# EAGLE board TestPlatform (EAGLE 9.6.2)
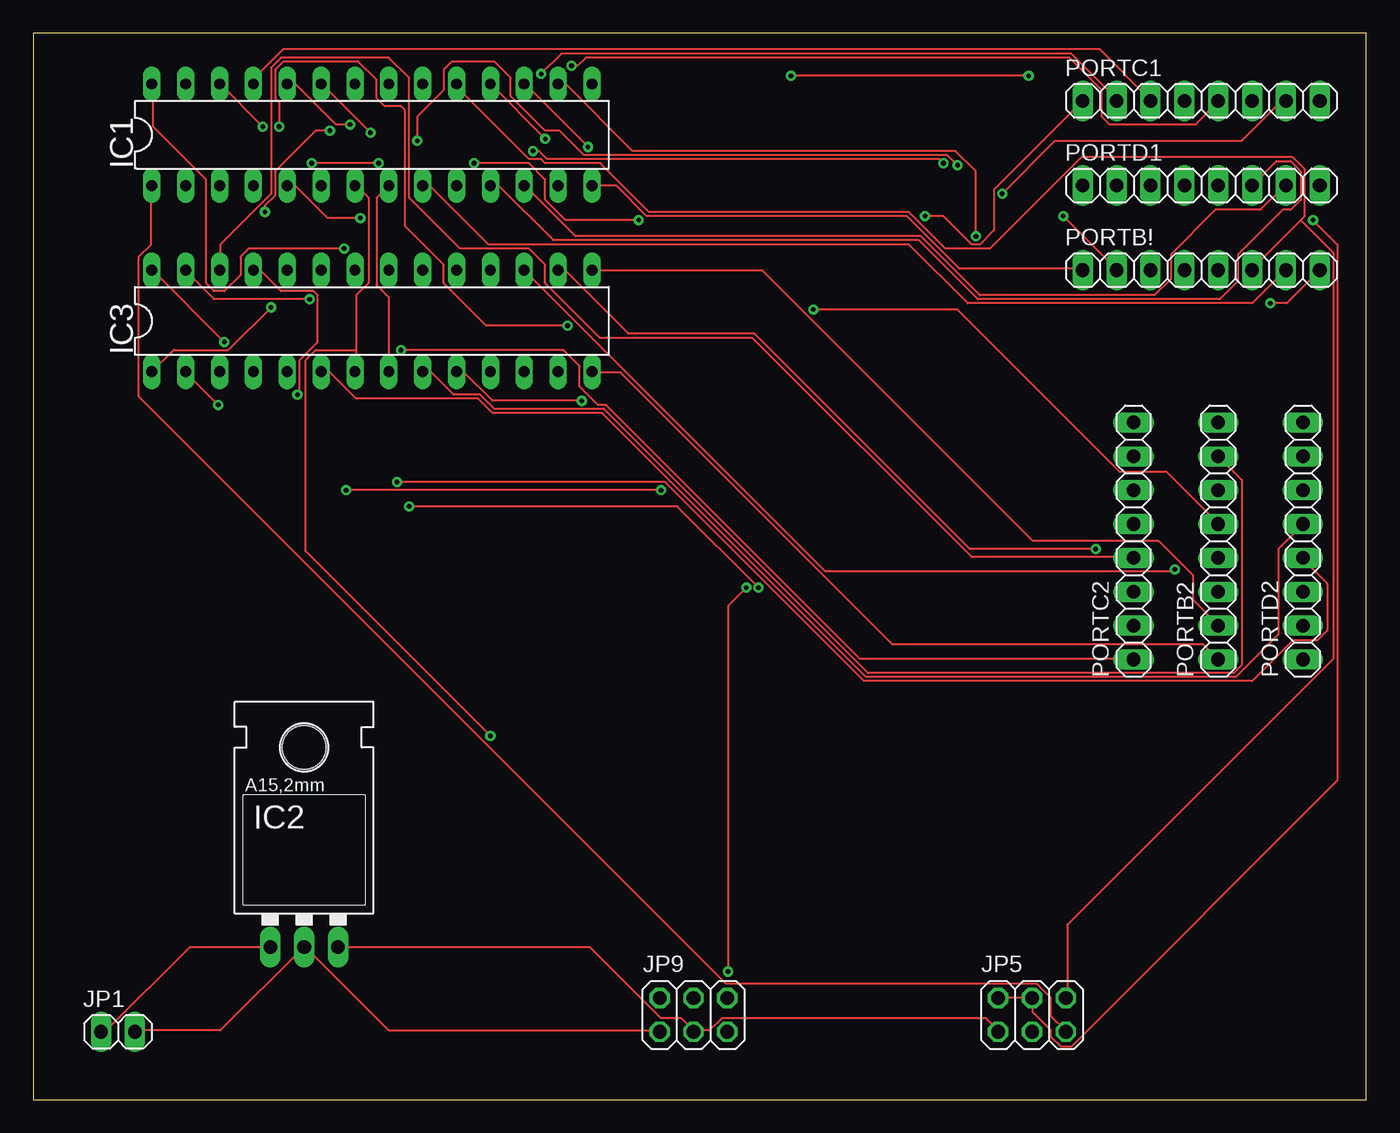
[diagram p0: board, top side]
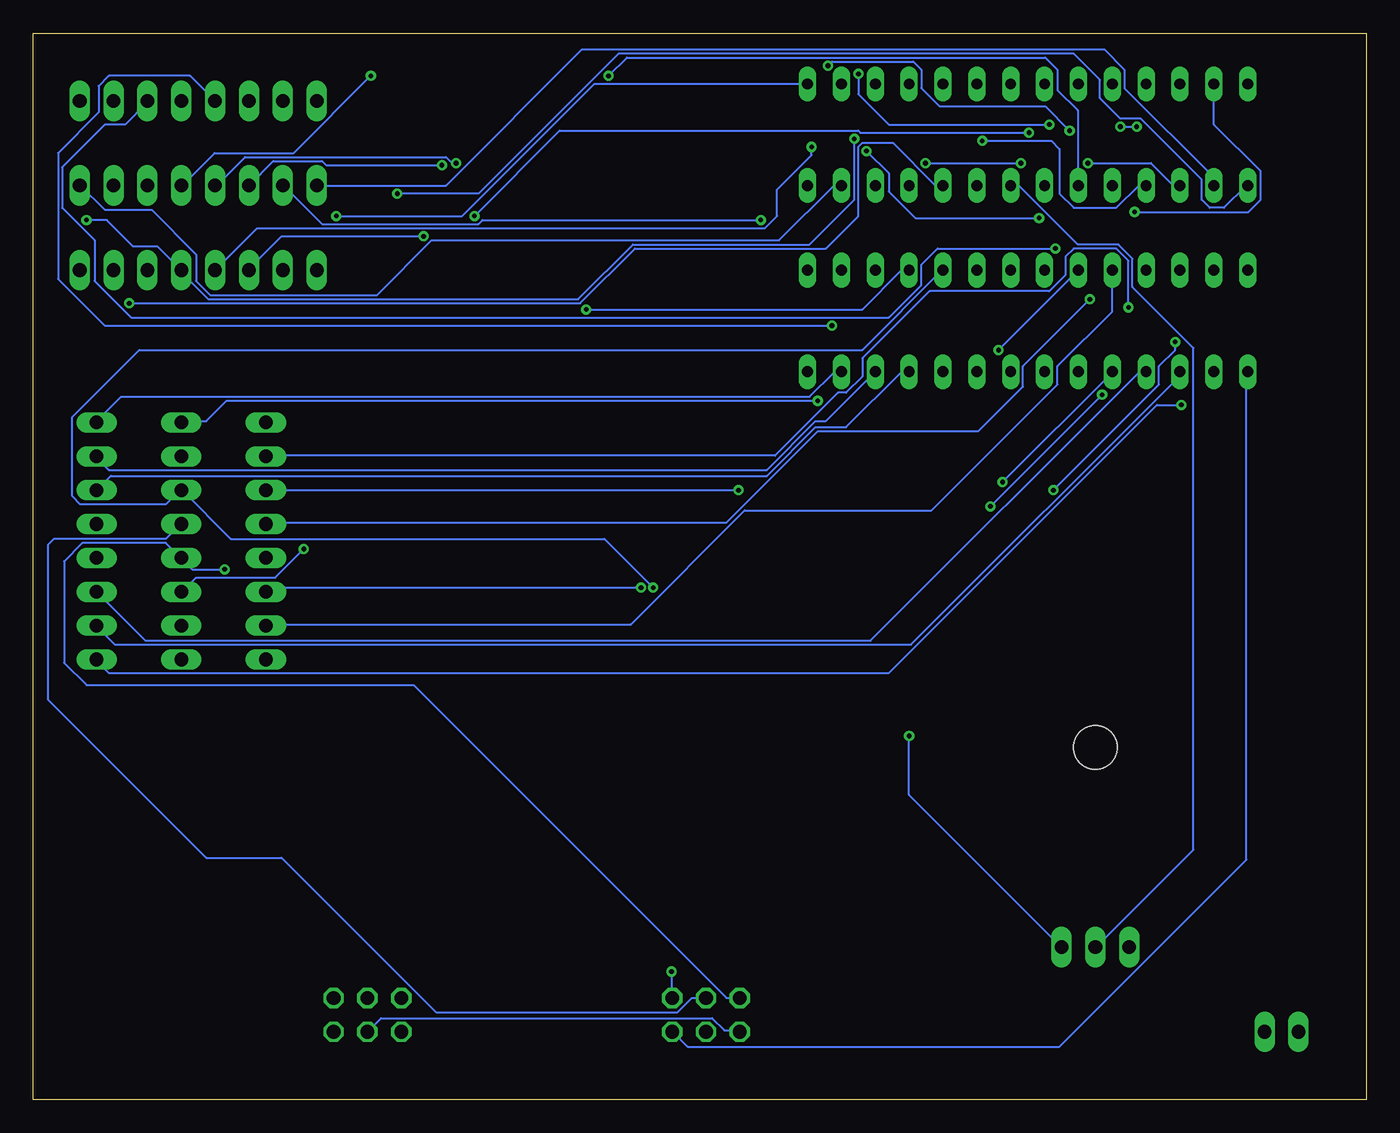
[diagram p1: board, bottom side, seen from below]

Size 100 x 80 mm. Coordinates in mm from the lower left corner, seen from the top.
Outline: 0,0 100,0 100,80 0,80 0,0
Copper layers (1*16): Top 0.035mm / dielectric 1.5mm / Bottom 0.035mm
Design rules "default": minimum track width 6mil, minimum drill 0.35mm, track to track 6mil, track to pad 6mil, pad to pad 6mil, via to via 6mil, smd to smd 6mil, copper to edge 40mil, drill to drill 6mil, minimum pad ring 10mil, minimum via ring 8mil, stop-mask expansion 4mil, vias tented up to drill 0mil, thermal gap 10mil

## Footprints (pad centres in the part's own frame; a part is rotated, then mirrored left to right if it is on the bottom)
DIL28-3 = drill 0.813 long: 1 -16.51,-3.81; 2 -13.97,-3.81; 3 -11.43,-3.81; 4 -8.89,-3.81; 5 -6.35,-3.81; 6 -3.81,-3.81; 7 -1.27,-3.81; 8 1.27,-3.81; 9 3.81,-3.81; 10 6.35,-3.81; 11 8.89,-3.81; 12 11.43,-3.81; 13 13.97,-3.81; 14 16.51,-3.81; 15 16.51,3.81; 16 13.97,3.81; 17 11.43,3.81; 18 8.89,3.81; 19 6.35,3.81; 20 3.81,3.81; 21 1.27,3.81; 22 -1.27,3.81; 23 -3.81,3.81; 24 -6.35,3.81; 25 -8.89,3.81; 26 -11.43,3.81; 27 -13.97,3.81; 28 -16.51,3.81
78XXL = drill 1.016 long: GND 0,-3.81; IN -2.54,-3.81; OUT 2.54,-3.81 | hole 3.302: 0,11.176
1X02 = drill 1.016 long: 1 -1.27,0; 2 1.27,0
2X03 = drill 1.016 octagon: 1 -2.54,-1.27; 2 -2.54,1.27; 3 0,-1.27; 4 0,1.27; 5 2.54,-1.27; 6 2.54,1.27
1X08 = drill 1.016 long: 1 -8.89,0; 2 -6.35,0; 3 -3.81,0; 4 -1.27,0; 5 1.27,0; 6 3.81,0; 7 6.35,0; 8 8.89,0

## Placement (x,y rotation side)
IC1  ATMEGA168-20P  [DIL28-3]  25.4,72.39 0 top
IC2  [78XXL]  20.32,15.24 0 top
IC3  ATMEGA168-20P  [DIL28-3]  25.4,58.42 0 top
JP1  [1X02]  6.35,5.08 0 top
JP5  [2X03]  74.93,6.35 0 top
JP9  [2X03]  49.53,6.35 0 top
PORTB2  [1X08]  88.9,41.91 90 top
PORTB!  [1X08]  87.63,62.23 0 top
PORTC1  [1X08]  87.63,74.93 0 top
PORTC2  [1X08]  82.55,41.91 90 top
PORTD1  [1X08]  87.63,68.58 0 top
PORTD2  [1X08]  95.25,41.91 90 top

## Library data of the parts
IC1 IC3 = adafruit
IC2 = v-reg
JP1 JP5 JP9 PORTB2 PORTB! PORTC1 PORTC2 PORTD1 PORTD2 = pinhead

## Nets
N$1: IC1.8 IC2.GND IC3.8 JP1.2 JP5.3 JP9.1
N$2: IC2.IN JP1.1
N$4: IC1.2 PORTD1.1
N$5: IC1.3 PORTD1.2
N$6: IC1.4 PORTD1.3
N$7: IC1.5 PORTD1.4
N$8: IC1.6 PORTD1.5
N$9: IC1.11 PORTD1.6
N$10: IC1.12 PORTD1.7
N$11: IC1.13 PORTD1.8
N$12: IC1.14 PORTB!.1
N$13: IC1.15 PORTB!.2
N$14: IC1.16 PORTB!.3
N$15: IC1.17 PORTB!.4
N$16: IC1.18 JP5.2 JP5.4 PORTB!.5
N$17: IC1.19 JP5.6 PORTB!.6
N$18: IC1.9 PORTB!.7
N$19: IC1.10 PORTB!.8
N$20: IC1.23 PORTC1.1
N$21: IC1.24 PORTC1.2
N$22: IC1.25 PORTC1.3
N$23: IC1.26 PORTC1.4
N$24: IC1.27 PORTC1.5
N$25: IC1.28 PORTC1.6
N$26: IC1.1 JP5.5 PORTC1.7
N$27: IC3.2 PORTD2.1
N$28: IC3.3 PORTD2.2
N$29: IC3.4 PORTD2.3
N$30: IC3.5 PORTD2.4
N$31: IC3.6 PORTD2.5
N$32: IC3.11 PORTD2.6
N$33: IC3.12 PORTD2.7
N$34: IC3.13 PORTD2.8
N$35: IC3.14 PORTB2.1
N$36: IC3.15 PORTB2.2
N$37: IC3.16 PORTB2.3
N$38: IC3.17 JP9.2 PORTB2.4
N$39: IC3.18 JP9.4 PORTB2.5
N$40: IC3.19 JP9.6 PORTB2.6
N$41: IC3.9 PORTB2.7
N$42: IC3.10 PORTB2.8
N$43: IC3.23 PORTC2.1
N$44: IC3.24 PORTC2.2
N$45: IC3.25 PORTC2.3
N$46: IC3.26 PORTC2.4
N$47: IC3.27 PORTC2.5
N$48: IC3.28 PORTC2.6
N$49: IC3.1 JP9.5 PORTC2.7
N$51: IC1.7 IC2.OUT IC3.7 JP5.1 JP9.3

## Tracks (layer width: path | path; a pad name or v marks a point on that pad's centre or on a via)
N$1
  Top 0.152: IC3.8 26.67,60.2 25.76,61.11 25.76,67.67 IC1.8 | JP1.2 7.62,5.18 14.02,5.18 20.27,11.43 IC2.GND 20.42,11.43 26.67,5.18 46.94,5.18 JP9.1
  Bottom 0.152: JP5.3 73.91,6.1 49.07,6.1 48.16,5.18 47.09,5.18 JP9.1 | IC1.8 26.06,68.58 21.64,64.16 18.59,64.16 17.53,63.09 17.53,60.96 12.95,56.39 12.95,18.75 20.27,11.43 IC2.GND
N$2
  Top 0.152: IC2.IN 11.73,11.43 5.49,5.18 5.18,5.18 JP1.1
N$4
  Bottom 0.152: IC1.2 11.43,69.19 18.14,75.89 18.14,77.27 19.66,78.79 58.83,78.79 69.04,68.58 PORTD1.1
N$5  (via drill 0.35)
  Top 0.152: v25.91,70.26 v20.88,70.26 | v33.07,70.26 37.19,70.26 38.41,69.04 38.41,67.51 39.93,65.99 v45.41,65.99
  Bottom 0.152: IC1.3 14.48,68.58 16.15,70.26 v20.88,70.26 | v33.07,70.26 v25.91,70.26 | v45.41,65.99 66.29,65.99 66.6,65.68 78.33,65.68 81.23,68.58 PORTD1.2
N$6  (via drill 0.35)
  Top 0.152: v28.8,71.93 28.8,73.76 30.79,75.74 30.79,77.27 31.39,77.88 34.59,77.88 35.81,76.66 35.81,75.29 38.41,72.69 39.47,72.69 41.3,70.87 68.58,70.87 v69.34,70.1
  Bottom 0.152: IC1.4 17.07,68.58 18.75,66.9 21.95,66.9 23.01,67.97 23.01,71.32 23.62,71.93 v28.8,71.93 | v69.34,70.1 78.03,70.1 78.33,70.41 81.99,70.41 PORTD1.3
N$7  (via drill 0.35)
  Top 0.152: IC1.5 19.66,68.58 22.1,66.14 v24.54,66.14 | v37.49,71.17 37.95,71.17 38.56,70.56 67.97,70.56 v68.28,70.26
  Bottom 0.152: v24.54,66.14 33.83,66.14 35.81,68.12 35.81,69.49 v37.49,71.17 | v68.28,70.26 68.58,70.26 69.04,70.71 84.12,70.71 86.26,68.58 PORTD1.4
N$8  (via drill 0.35)
  Top 0.152: v74.68,76.81 v56.84,76.81
  Bottom 0.152: v56.84,76.81 55.47,78.18 24.08,78.18 23.16,77.27 23.16,75.74 21.64,74.22 21.64,68.58 IC1.6 | v74.68,76.81 80.47,71.02 86.41,71.02 88.85,68.58 PORTD1.5
N$9
  Top 0.152: IC1.11 34.9,68.58 39.01,64.47 66.45,64.47 70.87,60.05 89,60.05 90.37,61.42 90.37,63.4 93.73,66.75 94.34,66.75 95.1,67.51 95.1,69.65 94.34,70.41 93.27,70.41 PORTD1.6
N$10
  Top 0.152: IC1.12 36.88,68.58 40.69,64.77 66.6,64.77 71.02,60.35 84.12,60.35 85.34,61.57 85.34,63.4 88.7,66.75 92.05,66.75 93.88,68.58 PORTD1.7
N$11
  Bottom 0.152: IC1.13 39.93,68.58 44.04,64.47 70.1,64.47 74.22,60.35 86.72,60.35 87.78,61.42 87.78,63.4 91.14,66.75 94.64,66.75 96.47,68.58 PORTD1.8
N$12
  Top 0.152: IC1.14 43.74,68.58 46.02,66.29 65.53,66.29 69.49,62.33 78.64,62.33 PORTB!.1
N$13  (via drill 0.35)
  Top 0.152: v77.27,66.29 81.23,62.33 PORTB!.2
  Bottom 0.152: IC1.15 57.91,76.2 67.82,66.29 v77.27,66.29
N$14  (via drill 0.35)
  Top 0.152: IC1.16 39.93,76.2 44.96,71.17 69.19,71.17 70.71,69.65 v70.71,64.77
  Bottom 0.152: v70.71,64.77 81.38,64.77 83.82,62.33 PORTB!.3
N$15  (via drill 0.35)
  Top 0.152: v41.6,71.48 36.88,76.2 IC1.17
  Bottom 0.152: v41.6,71.48 41.6,70.87 44.2,68.28 44.2,66.29 45.11,65.38 83.21,65.38 PORTB!.4
N$16  (via drill 0.35)
  Top 0.152: JP5.2 JP5.4 74.98,7.62 74.98,6.55 76.35,5.18 76.35,4.72 77.11,3.96 77.88,3.96 97.84,23.93 97.84,64.16 v96.01,65.99 | v38.41,72.08 IC1.18
  Bottom 0.152: v38.41,72.08 38.41,67.51 41.76,64.16 55.02,64.16 59.13,60.05 86.87,60.05 89,62.18 PORTB!.5 90.68,64.01 92.51,64.01 94.49,65.99 v96.01,65.99
N$17
  Top 0.152: 95.1,65.99 91.44,62.33 PORTB!.6 | 95.1,65.99 95.4,66.29 95.4,69.8 94.49,70.71 78.64,70.71 71.78,63.86 68.43,63.86 65.68,66.6 46.18,66.6 42.52,70.26 38.41,70.26 38.1,70.56 37.19,70.56 31.85,75.89 31.85,76.2 IC1.19 | 95.1,65.99 97.54,63.55 97.54,33.07 77.57,13.11 77.57,7.62 JP5.6
N$18
  Top 0.152: IC1.9 29.72,68.58 34.14,64.16 65.68,64.16 70.1,59.74 91.44,59.74 93.88,62.18 PORTB!.7
N$19  (via drill 0.35)
  Top 0.152: v92.81,59.74 94.03,59.74 PORTB!.8
  Bottom 0.152: IC1.10 32.31,68.58 35.51,71.78 37.8,71.78 38.1,71.48 38.1,66.29 40.54,63.86 54.86,63.86 58.98,59.74 v92.81,59.74
N$20  (via drill 0.35)
  Top 0.152: v25.3,72.54 21.64,76.2 IC1.23 | v66.9,66.29 68.28,66.29 70.41,64.16 71.02,64.16 72.08,65.23 72.08,68.28 PORTC1.1
  Bottom 0.152: v25.3,72.54 37.95,72.54 38.1,72.69 60.5,72.69 v66.9,66.29
N$21  (via drill 0.35)
  Top 0.152: IC1.24 19.66,76.2 22.71,73.15 v23.77,73.15 | v38.1,76.96 39.62,78.49 77.88,78.49 81.38,74.98 PORTC1.2
  Bottom 0.152: v23.77,73.15 35.81,73.15 38.1,75.44 v38.1,76.96
N$22
  Top 0.152: IC1.25 16.61,76.2 16.61,76.66 18.75,78.79 80.01,78.79 83.82,74.98 PORTC1.3
N$23  (via drill 0.35)
  Top 0.152: v17.22,73 14.02,76.2 IC1.26 | v18.44,73 18.44,74.83 18.14,75.13 18.14,77.27 18.75,77.88 24.38,77.88 25.76,76.5 25.76,75.13 26.36,74.52 27.58,74.52 27.89,74.22 27.89,65.53 30.79,62.64 30.79,61.27 33.98,58.06 v40.08,58.06
  Bottom 0.152: v18.44,73 v17.22,73 | v40.08,58.06 94.64,58.06 98.15,61.57 98.15,71.02 95.1,74.07 95.1,76.05 94.34,76.81 88.24,76.81 PORTC1.4
N$24  (via drill 0.35)
  Top 0.152: v17.37,66.6 17.37,67.06 18.14,67.82 18.14,69.65 21.18,72.69 v22.25,72.69 | v40.39,77.57 40.84,77.57 41.45,78.18 77.72,78.18 80.16,75.74 80.16,73.76 80.77,73.15 87.17,73.15 88.85,74.83 PORTC1.5
  Bottom 0.152: IC1.27 11.43,73.15 7.92,69.65 7.92,67.51 8.84,66.6 v17.37,66.6 | v22.25,72.69 24.08,74.52 32,74.52 33.38,75.89 33.38,77.27 33.98,77.88 40.08,77.88 v40.39,77.57
N$25  (via drill 0.35)
  Top 0.152: v23.32,63.86 16.15,63.86 15.54,63.25 15.54,61.87 14.33,60.66 13.56,60.66 12.95,61.27 12.95,69.04 8.99,73 8.99,76.2 IC1.28
  Bottom 0.152: v23.32,63.86 32.16,63.86 33.38,62.64 33.38,61.11 35.81,58.67 92.66,58.67 95.4,61.42 95.4,64.47 97.84,66.9 97.84,69.95 94.64,73.15 93.12,73.15 91.44,74.83 PORTC1.6
N$26  (via drill 0.35)
  Top 0.152: IC1.1 8.84,68.58 8.84,64.16 7.92,63.25 7.92,52.73 51.97,8.69 75.29,8.69 76.35,7.62 76.35,6.25 77.42,5.18 JP5.5 | v72.69,67.97 76.66,71.93 90.68,71.93 93.57,74.83 93.88,74.83 PORTC1.7
  Bottom 0.152: v72.69,67.97 66.6,67.97 56.08,78.49 21.95,78.49 19.96,76.5 19.96,75.13 18.44,73.61 16.92,73.61 12.34,69.04 12.34,67.51 11.73,66.9 10.67,66.9 8.99,68.58 IC1.1
N$27  (via drill 0.35)
  Top 0.152: v13.87,52.12 11.43,54.56 IC3.2
  Bottom 0.152: v13.87,52.12 15.7,52.12 35.81,32 94.34,32 95.25,32.92 PORTD2.1
N$28
  Bottom 0.152: IC3.3 14.02,54.56 14.02,54.25 34.14,34.14 93.88,34.14 95.25,35.51 PORTD2.2
N$29
  Bottom 0.152: PORTD2.3 91.59,34.44 37.19,34.44 17.07,54.56 16.61,54.56 IC3.4
N$30  (via drill 0.35)
  Top 0.152: v27.28,46.33 47.4,46.33 62.33,31.39 91.44,31.39 94.49,34.44 96.32,34.44 97.08,35.2 97.08,38.71 95.25,40.54 PORTD2.4
  Bottom 0.152: v27.28,46.33 19.05,54.56 IC3.5
N$31
  Top 0.152: IC3.6 21.64,54.56 22.25,54.56 24.23,52.58 33.38,52.58 34.44,51.51 42.67,51.51 62.48,31.7 90.22,31.7 93.42,34.9 93.42,41.3 95.25,43.13 PORTD2.5
N$32
  Bottom 0.152: PORTD2.6 94.18,46.79 44.96,46.79 41.3,50.44 39.01,50.44 34.9,54.56 34.29,54.56 IC3.11
N$33
  Bottom 0.152: IC3.12 40.54,50.9 41.3,50.9 44.96,47.24 94.34,47.24 95.25,48.16 PORTD2.7
N$34
  Bottom 0.152: IC3.13 39.47,54.56 39.93,54.56 41.76,52.73 93.42,52.73 95.25,50.9 PORTD2.8
N$35
  Top 0.152: PORTB2.1 87.78,34.14 64.47,34.14 44.04,54.56 41.91,54.56 IC3.14
N$36
  Top 0.152: IC3.15 41.91,62.18 54.71,62.18 74.98,41.91 84.43,41.91 87.02,39.32 87.02,37.49 88.85,35.66 PORTB2.2
N$37  (via drill 0.35)
  Top 0.152: v79.7,41.3 70.26,41.3 54.1,57.45 44.65,57.45 39.93,62.18 39.47,62.18 IC3.16
  Bottom 0.152: v79.7,41.3 81.84,39.17 87.78,39.17 88.85,38.1 PORTB2.3
N$38  (via drill 0.35)
  Top 0.152: IC3.17 59.44,39.62 85.5,39.62 v85.65,39.78
  Bottom 0.152: v85.65,39.78 88.09,39.78 88.85,40.54 PORTB2.4 89,40.69 90.07,41.76 96.32,41.76 97.69,40.39 97.69,32.77 96.01,31.09 71.48,31.09 48.01,7.62 JP9.2
N$39  (via drill 0.35)
  Top 0.152: v58.52,59.28 69.34,59.28 81.53,47.09 85.04,47.09 88.85,43.28 PORTB2.5
  Bottom 0.152: v58.52,59.28 37.8,59.28 34.9,62.18 34.29,62.18 IC3.18 | JP9.4 50.6,7.62 51.66,6.55 69.8,6.55 81.38,18.14 87.02,18.14 98.91,30.02 98.91,41.6 98.45,42.06 90.07,42.06 89,43.13 PORTB2.5
N$40  (via drill 0.35)
  Top 0.152: v52.12,9.6 52.12,37.03 v53.49,38.41
  Bottom 0.152: IC3.19 31.85,62.18 37.8,56.24 92.05,56.24 97.08,51.21 97.08,45.26 96.47,44.65 90.07,44.65 89,45.72 PORTB2.6 88.85,45.72 85.19,42.06 57.15,42.06 v53.49,38.41 | v52.12,9.6 52.12,7.62 JP9.6
N$41
  Top 0.152: PORTB2.7 90.68,46.48 90.68,32.61 90.07,32 62.64,32 42.82,51.82 34.59,51.82 33.53,52.88 31.55,52.88 29.87,54.56 29.26,54.56 IC3.9
N$42  (via drill 0.35)
  Top 0.152: v41.15,52.43 34.44,52.43 32.31,54.56 31.85,54.56 IC3.10
  Bottom 0.152: v41.15,52.43 85.5,52.43 87.02,50.9 88.85,50.9 PORTB2.8
N$43  (via drill 0.35)
  Top 0.152: v27.58,56.24 39.78,56.24 41,55.02 41,53.49 42.37,52.12 42.98,52.12 62.03,33.07 82.45,33.07 PORTC2.1
  Bottom 0.152: v27.58,56.24 IC3.23
N$44
  Bottom 0.152: IC3.24 19.05,59.13 23.16,55.02 23.16,53.65 32.61,44.2 46.63,44.2 55.17,35.66 82.45,35.66 PORTC2.2
N$45  (via drill 0.35)
  Top 0.152: v19.81,52.88 19.96,53.03 19.96,55.47 21.34,56.84 21.34,60.35 21.03,60.66 18.59,60.66 17.07,62.18 16.61,62.18 IC3.25 | v28.19,44.5 48.31,44.5 v54.41,38.41
  Bottom 0.152: v28.19,44.5 v19.81,52.88 | v54.41,38.41 82.14,38.41 82.45,38.1 PORTC2.3
N$46
  Top 0.152: IC3.26 14.02,62.33 14.02,64.16 17.83,67.97 17.83,77.42 18.59,78.18 26.67,78.18 28.19,76.66 28.19,67.67 32,63.86 37.19,63.86 38.41,62.64 38.41,61.27 42.52,57.15 53.95,57.15 70.41,40.69 82.45,40.69 PORTC2.4
N$47  (via drill 0.35)
  Top 0.152: v20.73,60.05 13.56,60.05 11.43,62.18 IC3.27
  Bottom 0.152: v20.73,60.05 25.76,55.02 25.76,53.49 29.11,50.14 41.15,50.14 48.01,43.28 82.45,43.28 PORTC2.5
N$48  (via drill 0.35)
  Top 0.152: v14.33,56.84 8.99,62.18 IC3.28 | v47.09,45.72 v23.47,45.72
  Bottom 0.152: v14.33,56.84 14.33,56.24 15.54,55.02 15.54,53.65 v23.47,45.72 | PORTC2.6 v47.09,45.72
N$49  (via drill 0.35)
  Top 0.152: v17.83,59.44 14.63,56.24 10.52,56.24 IC3.1
  Bottom 0.152: IC3.1 8.99,54.56 8.99,17.98 23.01,3.96 50.9,3.96 51.97,5.03 JP9.5 | v17.83,59.44 17.83,62.94 18.75,63.86 21.95,63.86 22.55,63.25 22.55,61.87 23.77,60.66 32.77,60.66 37.8,55.63 37.8,54.25 39.01,53.03 39.62,53.03 44.35,48.31 82.45,48.31 PORTC2.7
N$51  (via drill 0.35)
  Top 0.152: 24.23,56.24 24.23,60.35 25.15,61.27 25.15,67.67 24.23,68.58 IC1.7 | 24.23,56.24 24.23,54.71 IC3.7 | 49.53,5.18 50.75,5.18 51.66,6.1 71.48,6.1 72.39,5.18 JP5.1 | IC2.OUT 41.76,11.43 47.09,6.1 48.62,6.1 49.53,5.18 | 49.53,5.18 JP9.3 | 24.23,56.24 21.18,56.24 20.42,55.47 20.42,41.15 v34.29,27.28
  Bottom 0.152: v34.29,27.28 34.29,22.86 IC2.OUT